# Altium PCB MGMEZZ04_LoopBack.PcbDoc
Units mil, origin at the board's own origin, x right, y up, seen from the top; angles counter-clockwise.
Board outline 915 x 2800 mil, 4 copper layers (Top Layer, Internal Plane 1, Internal Plane 2, Bottom Layer), stack 30.634 mil thick; 42 components, 48 nets, 146 pads, 49 vias.
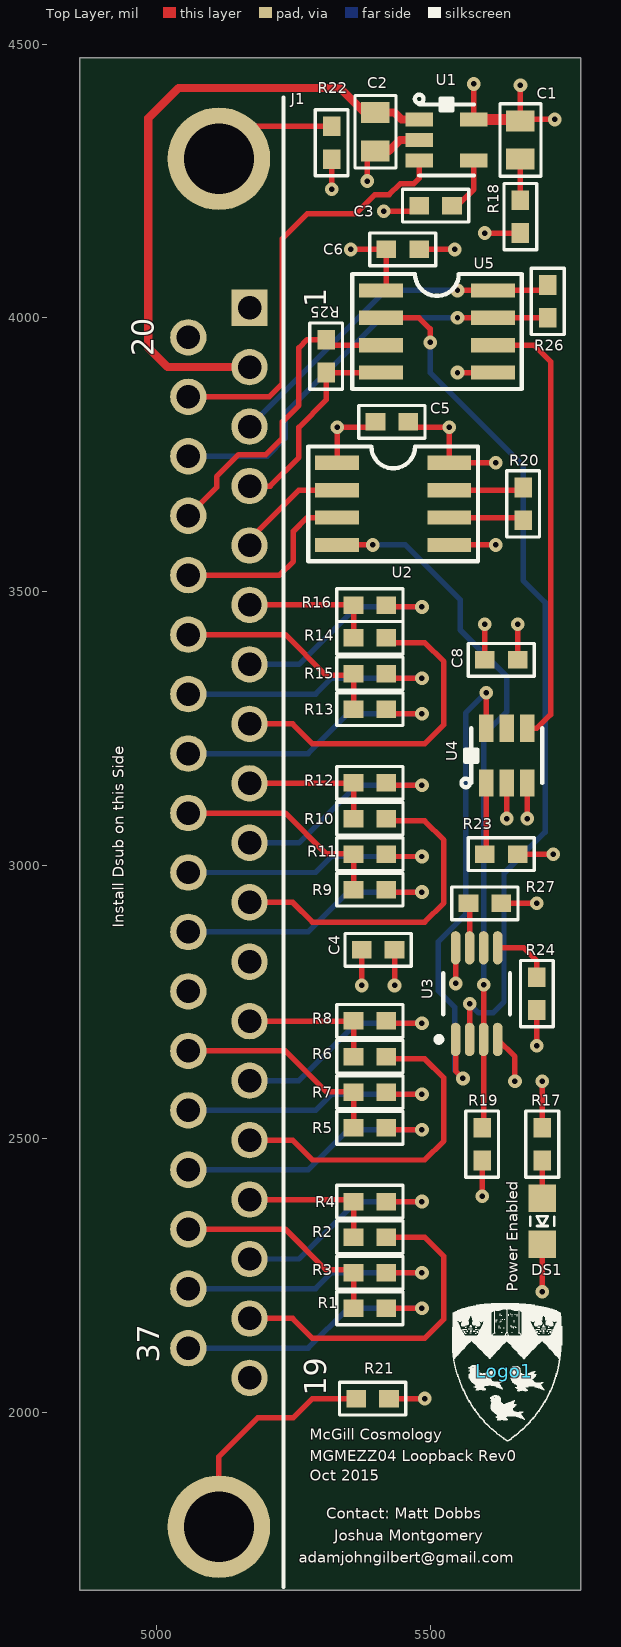
[diagram p0: Top Layer view]
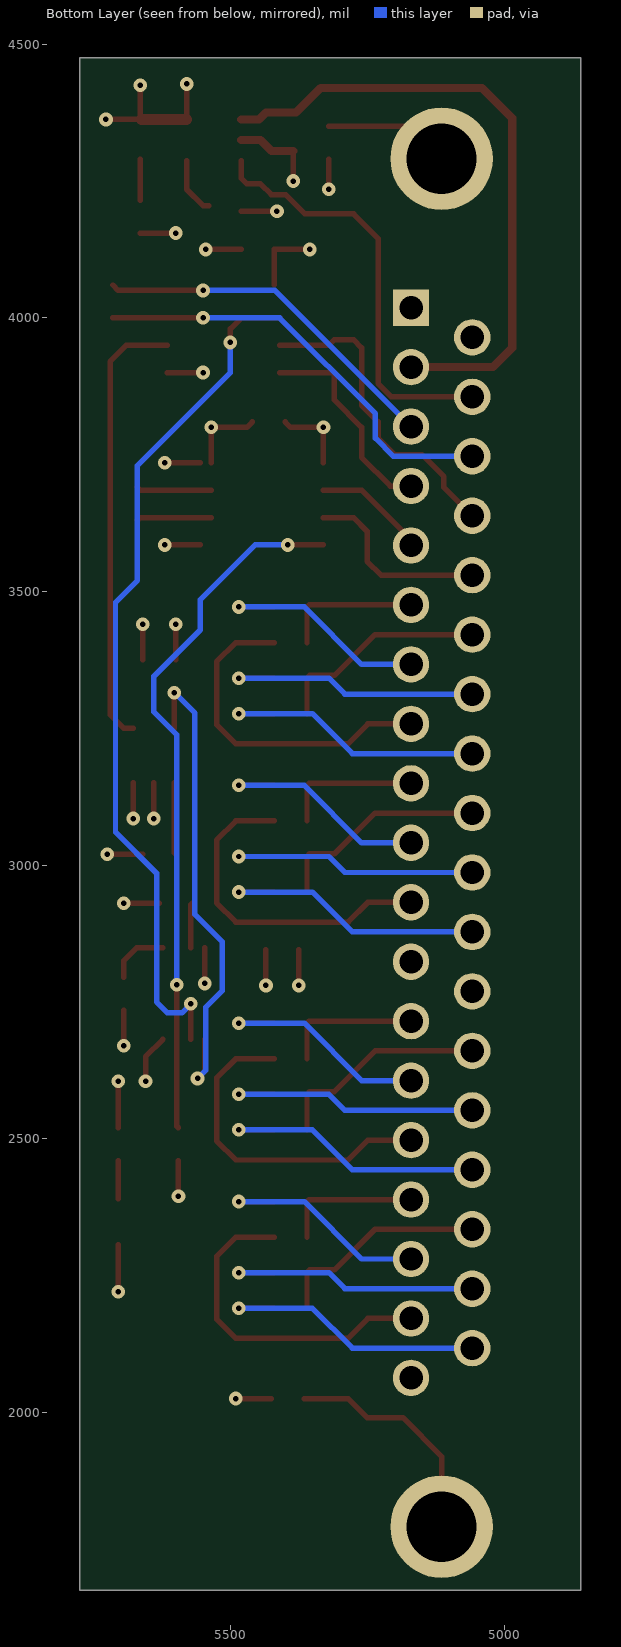
[diagram p1: Bottom Layer view, seen from below]
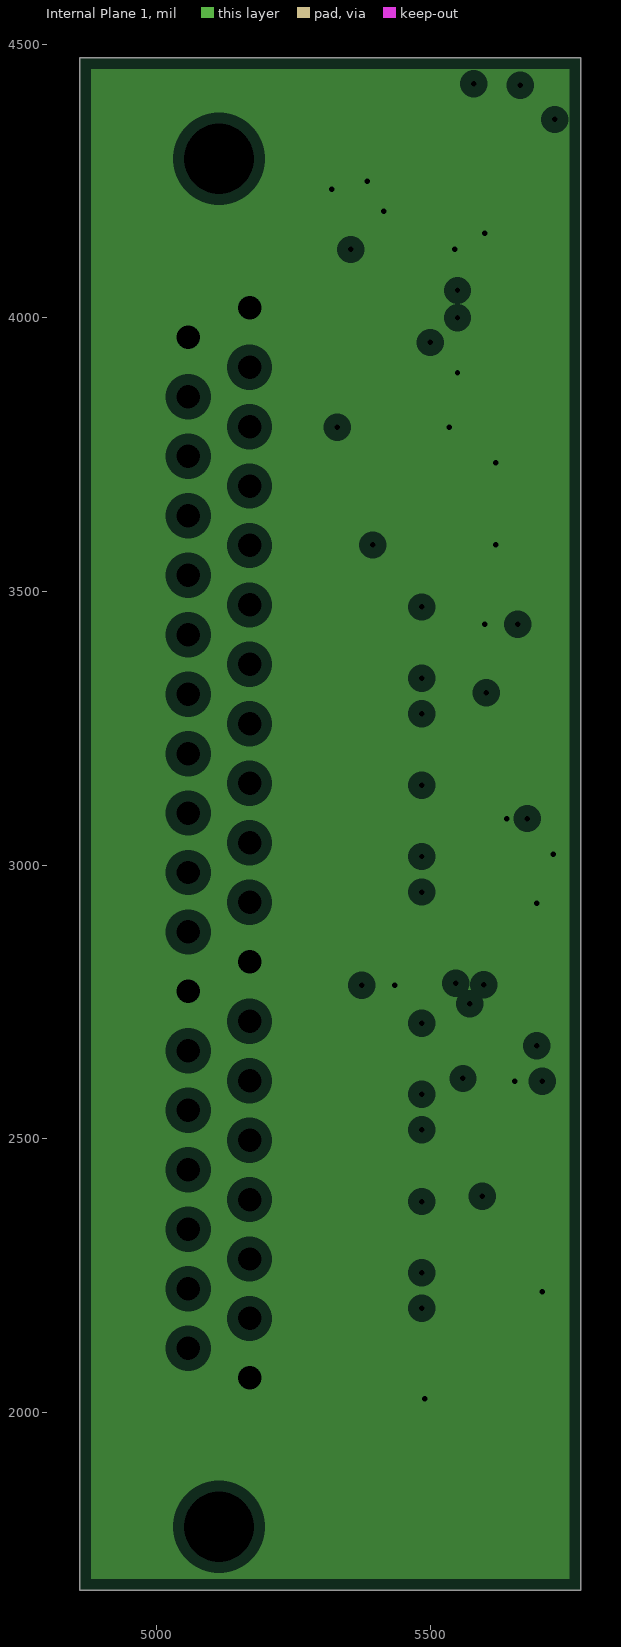
[diagram p2: Internal Plane 1, clearances drawn from the general rule]
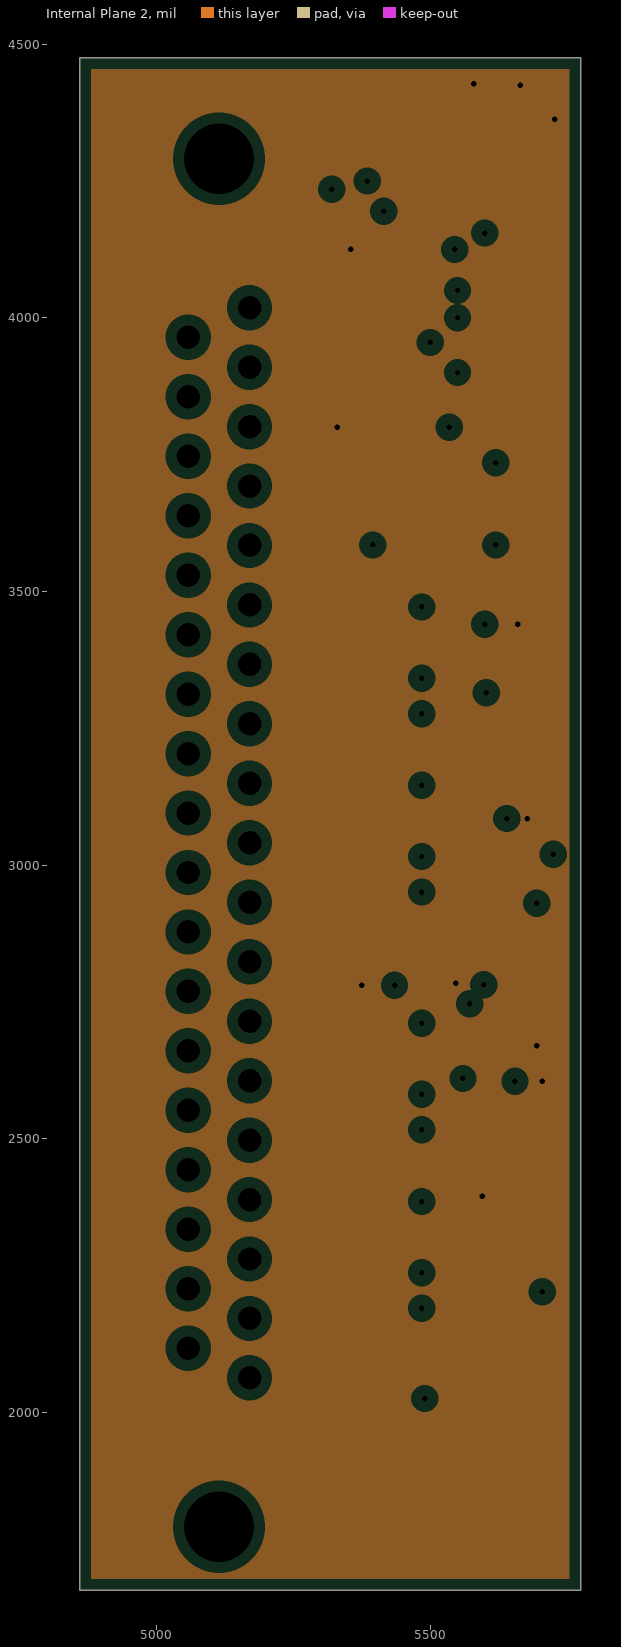
[diagram p3: Internal Plane 2, clearances drawn from the general rule]

## Layer stack, top to bottom
Top Solder: solder mask 0.4, Solder Resist, Dk 3.5
Top Layer: signal copper 1.4
Dielectric 1: core 10, FR-4, Dk 4.2
Internal Plane 1: plane copper 1.417, net GND
Dielectric 3: prepreg 5, Dk 4.2
Internal Plane 2: plane copper 1.417, net 5VD
Dielectric 2: core 10, Dk 4.2
Bottom Layer: signal copper 1.4
Bottom Solder: solder mask 0.4, Solder Resist, Dk 3.5

## Board outline
4860,1675 5775,1675 5775,4475 4860,4475

## Design rules (kind name [scope] priority, off if disabled: settings)
Clearance [All] p1: gap=7
DiffPairsRouting [All] p1: maxlimit=10 minlimit=10 mostfreqgap=10 toplayer_minwidth=10 toplayer_maxwidth=15 toplayer_prefwidth=15 bottomlayer_minwidth=10 bottomlayer_maxwidth=15 bottomlayer_prefwidth=15 maxuncoupledlength=500
HoleSize [All] p1: absolutevalues=TRUE maxlimit=500 minlimit=8 maxpercent=80.000 minpercent=20.000
MinimumSolderMaskSliver [All] p1: minsoldermaskwidth=3.5
PlaneClearance [All] p1: clearance=20
PlaneConnect [All] p1: planeconnectstyle=Relief reliefexpansion=20 reliefentries=4 reliefconductorwidth=10 reliefairgap=10
PolygonConnect [All] p1: connectstyle=Relief reliefconductorwidth=10 reliefentries=4 polygonreliefangle="90 Angle" airgapwidth=10
RoutingVias [All] p1: holewidth=28 width=50 viastyle="Through Hole" minholewidth=28 minwidth=50 maxholewidth=28 maxwidth=50
SilkToSilkClearance [All] p1: silktosilkclearance=0
SilkToSolderMaskClearance [IsPad] p1: minsilkscreentomaskgap=5 clearancetoexposedcopper=TRUE
SolderMaskExpansion [All] p1: expansion=3
Width [All] p1: maxlimit=100 minlimit=10 preferedwidth=10 minimp=50.000000 maximp=50.000000 favimp=50.000000
23 further rules are at their usual default settings.

## Classes and differential pairs
differential pair SDA_MOSI: +SDA_MOSI_P -SDA_MOSI_N
differential pair SDA_MISO: +SDA_MISO_P -SDA_MISO_N
differential pair SCL: +SCL_P -SCL_N

## Components (designator, comment, footprint, x,y, rotation, side; value= is the part's Value field where it differs from the comment)
C1 "4.7uF, 10V" 0805 5665,4290 r90 top
C2 "4.7uF, 10V" 0805 5400,4305 r90 top
C3 "470pF" 0603 5480,4205 r0 top
C4 "0.1uF" 0603 5435,2845 r180 top
C5 "0.1uF" 0603 5460,3810 r180 top
C6 "0.1uF" 0603 5480,4125 r180 top
C8 "0.1uF" 0603 5600,3375 r0 top
DS1 "LED, 0805, Green" 0805L 5705,2390.58 r270 top
J1 "DB37M" DSUB37-M 5114.02,4290.75 r90 top
Logo1 "McGillLogo" McGillLogo1 5635,2075 r0 top
R1 "4.99k" 0603 5360,2190 r0 top
R2 "4.99k" 0603 5360,2320 r0 top
R3 "4.99k" 0603 5360,2255 r0 top
R4 "4.99k" 0603 5360,2385 r0 top
R5 "4.99k" 0603 5360,2520 r0 top
R6 "4.99k" 0603 5360,2650 r0 top
R7 "4.99k" 0603 5360,2585 r0 top
R8 "4.99k" 0603 5360,2715 r0 top
R9 "4.99k" 0603 5360,2955 r0 top
R10 "4.99k" 0603 5360,3085 r0 top
R11 "4.99k" 0603 5360,3020 r0 top
R12 "4.99k" 0603 5360,3150 r0 top
R13 "4.99k" 0603 5360,3285 r0 top
R14 "4.99k" 0603 5360,3415 r0 top
R15 "4.99k" 0603 5360,3350 r0 top
R16 "4.99k" 0603 5360,3475 r0 top
R17 "100" 0603 5705,2520 r270 top
R18 "4.99k" 0603 5665,4155 r90 top
R19 "4.99k" 0603 5595,2520 r270 top
R20 "DNL" 0603 5670,3630 r90 top
R21 "0" 0603 5365,2025 r0 top
R22 "0" 0603 5320,4290 r90 top
R23 "DNL" 0603 5600,3020 r0 top
R24 "4.99k" 0603 5695,2795 r270 top
R25 "100" 0603 5310,3900 r90 top
R26 "100" 0603 5715,4060 r270 top
R27 "4.99k" 0603 5630,2930 r180 top
U1 "MIC5219-5.0YM5 TR" SOT23-5 5480,4325 r270 top
U2 "DS90C401M/NOPB" SO8 5330,3735 r0 top
U3 "P82B96DP,118" MSOP8-P82B96 5585,2765 r90 top
U4 "AD7414ARTZ-0500RL7" SOT23-6 5640,3150 r0 top
U5 "DS90C402M/NOPB" SO8 5410,4050 r0 top

## Footprints (in the part's own frame and the unit in brackets; to place one, negate y for a bottom-side part, rotate by r counter-clockwise, add the part's x,y. Pads: shape width x height; smd on the part's side, far side on the other; paste and mask are expansions set on the pad)
0603 [mil]
  rect 36x32 smd: 1(0,0) 2(60,0)
  silkscreen extent -30,-30 90,30, body extent -15,-15 75,15, height 39
0805 [mil]
  rect 38.5x52 smd: 1(0,0) 2(70,0)
  silkscreen extent -31,-38 101,38
0805L [mil] "0805 LED"
  rect 50x50 smd: 1(-0.4,0.18) 2(83.6,0.18)
  silkscreen extent 33,-22 50,22
DSUB37-M [mm] "DSUB 37Pin Male"
  rect 1.69x1.69 hole 1.09: 1(-6.912,-1.42)
  round 1.69 hole 1.09: 2(-9.672,-1.42) 3(-12.432,-1.42) 4(-15.192,-1.42) 5(-17.952,-1.42) 6(-20.712,-1.42) 7(-23.472,-1.42) 8(-26.232,-1.42) 9(-28.992,-1.42) 10(-31.752,-1.42) 11(-34.512,-1.42) 12(-37.272,-1.42) 13(-40.032,-1.42) 14(-42.792,-1.42) 15(-45.552,-1.42) 16(-48.312,-1.42) 17(-51.072,-1.42) 18(-53.832,-1.42) 19(-56.592,-1.42) 20(-8.291,1.42) 21(-11.051,1.42) 22(-13.811,1.42) 23(-16.571,1.42) 24(-19.331,1.42) 25(-22.091,1.42) 26(-24.851,1.42) 27(-27.611,1.42) 28(-30.371,1.42) 29(-33.131,1.42) 30(-35.891,1.42) 31(-38.651,1.42) 32(-41.411,1.42) 33(-44.171,1.42) 34(-46.931,1.42) 35(-49.691,1.42) 36(-52.451,1.42) 37(-55.211,1.42)
  round 4.76 hole 3.26: 38(0,0) 39(-63.5,0)
  silkscreen extent -66.29,-3 2.84,-3
McGillLogo1 [mil] "McGillLogo"
  silkscreen extent -95,-127 106,124
MSOP8-P82B96 [mm] "TSOP, 8-Leads, Body 3.1x3.1mm (max), Pitch 0.65mm, IPC Medium Density"
  oval 1.55x0.45 smd paste-0.051 mask+0.102: 1(-2.125,0.975) 2(-2.125,0.325) 3(-2.125,-0.325) 4(-2.125,-0.975) 5(2.125,-0.975) 6(2.125,-0.325) 7(2.125,0.325) 8(2.125,0.975)
  silkscreen extent -2.25,-1.55 0.95,1.87, body extent -1.55,-1.55 1.55,1.55, height 1.1
SO8 [mil]
  round 10 on Top Overlay: 0(-40,40)
  rect 80x26 smd: 1(0,0) 2(0,-50) 3(0,-100) 4(0,-150) 5(205,-150) 6(205,-100) 7(205,-50) 8(205,0)
  silkscreen extent -52,-180 258,30, body extent -40,-165 245,15, height 39
SOT23-5 [mil]
  rect 26x50 smd: 1(-37.5,0) 2(0,0) 3(37.5,0) 4(37.5,100) 5(-37.5,100)
  silkscreen extent -83,-8 65,100
SOT23-6 [mil]
  rect 26x50 smd: 1(-37.5,0) 2(0,0) 3(37.5,0) 4(37.5,100) 5(0,100) 6(-37.5,100)
  silkscreen extent -83,-8 65,100

## Part data
C1 C2: library part "CAP 0805", "Capacitor, Ceramic, 0805"
C3 C4 C5 C6 C8: library part Cap0603, "Capacitor, Ceramic, 0603"
DS1: library part LED, "LED GREEN CLEAR 0805 SMD"
Logo1: library part Logo
R1 R2 R3 R4 R5 R6 R7 R8 R9 R10 R11 R12 R13 R14 R15 R16 R18 R19 R20 R23 R24 R27: library part Res0603, "RES 0603"
R17 R21 R22 R25 R26: library part "RES 0603", "RES 0603"
U1: library part TPS73601DBVR, "Adjustable 30uVrms noise 400mA regulator"
U2: "IC DRV LVDS DUAL DIFF SGNL 8SOIC"
U3: library part P82B96, "IC DUAL BI-DIR BUS BUFFER 8-TSSOP"
U4: "Digital Temperature Sensor, 11-Bit, +/-2 Degree Accurate"
U5: "IC REC LVDS DUAL DIFF SGNL 8SOIC"

## Via types
v1: diameter 25, hole 10, Top Layer to Bottom Layer, 49 vias

## Nets (pads, with @x,y where several pads share a name; then routed paths per layer and width w, separated by ;. In a path a pad name is that pad's centre, name@x,y a point inside that pad or via, vN(x,y) a via of type N, cw(c..) or ccw(c..) an arc to the next point about the centre after c; other vN are vias at no path point)
5VD: C1.2 C4.2 C5.2 C6.2 C8.2 R17.1 R19.2 R24.2 U1.5 U2.1 U3.8 U4.3 U5.1 | length 1025.2
  Top Layer w10: U2.1 v1(5330,3800) 5390,3800 C5.2 ; v1(5355,4125) C6.2 U5.1@5420,4060 ; v1(5375,2780) C4.2 ; v1(5546.61,2783.66) U3.8 ; U1.5 v1(5580,4427.5) ; v1(5595,2395) R19.2 ; C8.2 v1(5660,3440) ; v1(5665,4425) C1.2 5662.5,4362.5 v1(5727.5,4362.5) ; v1(5677.5,3085) U4.3 ; v1(5695,2670) R24.2 ; R17.1 v1(5705,2605)
  Top Layer w20: U1.5 C1.2@5662.5,4362.5
CARRIER1_N: J1.18 R2.2 | length 619.1
  Top Layer w10: J1.18 5248.62,2171.38 5285,2135 5490,2135 5525,2170 5525,2285 5490,2320 R2.2
CARRIER1_P: J1.37 R1.2 | length 522.1
  Top Layer w10: R1.2 v1(5485,2190)
  Bottom Layer w10: J1.37 5277.09,2117.09 5350,2190 v1(5485,2190)
CARRIER2_N: J1.15 R6.2 | length 619.1
  Top Layer w10: J1.15 5248.62,2497.36 5285,2460.98 5490,2460.98 5525,2495.98 5525,2610.98 5490,2645.98 R6.2@5420,2645.98
CARRIER2_P: J1.34 R5.2 | length 522.1
  Top Layer w10: R5.2@5420,2515.98 v1(5485,2515.98)
  Bottom Layer w10: J1.34 5277.09,2443.07 5350,2515.98 v1(5485,2515.98)
CARRIER3_N: J1.11 R10.2 | length 619.1
  Top Layer w10: J1.11 5248.62,2932.01 5285,2895.63 5490,2895.63 5525,2930.63 5525,3045.63 5490,3080.63 R10.2@5420,3080.63
CARRIER3_P: J1.30 R9.2 | length 522.1
  Top Layer w10: R9.2@5420,2950.63 v1(5485,2950.63)
  Bottom Layer w10: J1.30 5277.09,2877.72 5350,2950.63 v1(5485,2950.63)
CARRIER4_N: J1.8 R14.2 | length 619.1
  Top Layer w10: J1.8 5248.62,3257.99 5285,3221.61 5490,3221.61 5525,3256.61 5525,3371.61 5490,3406.61 R14.2@5420,3406.61
CARRIER4_P: J1.27 R13.2 | length 522.1
  Top Layer w10: R13.2@5420,3276.61 v1(5485,3276.61)
  Bottom Layer w10: J1.27 5277.09,3203.7 5350,3276.61 v1(5485,3276.61)
DEMOD1_N: J1.16 R2.1 R4.1 | length 256.6
  Top Layer w10: J1.16 5356.3,2388.7 R4.1 R2.1
DEMOD1_P: J1.35 R1.1 R3.1 | length 399.8
  Top Layer w10: J1.35 5235.59,2334.41 5310,2260 5355,2260 R3.1 R1.1
DEMOD2_N: J1.13 R6.1 R8.1 | length 256.6
  Top Layer w10: J1.13 5356.3,2714.69 5360,2710.98 R6.1@5360,2645.98
DEMOD2_P: J1.32 R5.1 R7.1 | length 399.8
  Top Layer w10: J1.32 5235.59,2660.39 5310,2585.98 5355,2585.98 5360,2580.98 R5.1@5360,2515.98
DEMOD3_N: J1.9 R10.1 R12.1 | length 256.6
  Top Layer w10: J1.9 5356.3,3149.33 5360,3145.63 R10.1@5360,3080.63
DEMOD3_P: J1.28 R9.1 R11.1 | length 399.8
  Top Layer w10: J1.28 5235.59,3095.04 5310,3020.63 5355,3020.63 5360,3015.63 R9.1@5360,2950.63
DEMOD4_N: J1.6 R14.1 R16.1 | length 256.6
  Top Layer w10: J1.6 5356.3,3475.32 5360,3471.61 R14.1@5360,3406.61
DEMOD4_P: J1.25 R13.1 R15.1 | length 399.8
  Top Layer w10: J1.25 5235.59,3421.02 5310,3346.61 5355,3346.61 5360,3341.61 R13.1@5360,3276.61
GND: C2.1 C3.1 C4.1 C5.1 C6.1 C8.1 DS1.2 J1.1 J1.12 J1.19 J1.20 J1.31 R18.1 R21.2 R22.1 R23.2 R27.1 U1.2 U2.5 U2.8 U3.4 U4.2 U5.5 | length 1313.3
  Top Layer w10: v1(5320,4235) R22.1 ; v1(5385,4250) C2.1@5385,4305 ; v1(5415,4195) C3.1@5480,4195 ; R21.2 v1(5490,2025) ; v1(5435,2780) C4.1 ; C5.1 5470,3800 v1(5535,3800) U2.8 ; C6.1 v1(5545,4125) ; v1(5550,3900) U5.5 ; U2.5@5555,3585 v1(5620,3585) ; U2.8@5555,3735 v1(5620,3735) ; C8.1 v1(5600,3440) ; v1(5600,4155) R18.1 ; U3.4 5655,2649.72 v1(5655,2605) ; R27.1 v1(5695,2930) ; v1(5640,3085) U4.2 ; R23.2 v1(5725,3020) ; v1(5705,2220) 5705,2306.22 DS1.2@5705.18,2306.4
  Top Layer w15: C2.1@5385,4305 5425,4305 5445,4325 U1.2
NetC1_1: C1.1 R18.2 | length 75
  Top Layer w10: R18.2 C1.1
NetC3_2: C3.2 U1.4 | length 104.9
  Top Layer w10: C3.2 5550,4205 5580,4235 U1.4
NetDS1_1: DS1.1 R17.2 | length 69.7
  Top Layer w10: R17.2 5705,2390.58 DS1.1@5705.18,2390.4
NetJ1_38: J1.38 R22.2 | length 230.5
  Top Layer w10: J1.38 5173.27,4350 R22.2
NetJ1_39: J1.39 R21.1 | length 423.2
  Top Layer w10: J1.39 5114.02,1919.02 5185,1990 5250,1990 5285,2025 R21.1
NetR19_1: R19.1 U2.4 U3.3 | length 1285.3
  Top Layer w10: U2.4 v1(5395,3585) ; R19.1 5597.8,2522.8 U3.3 v1(5597.8,2781.34)
  Bottom Layer w10: v1(5395,3585) 5455,3585 5555,3485 5555,3430 5640,3345 5640,3280 5597.8,3237.8 v1(5597.8,2781.34)
NetR20_1: R20.1 U2.6 | length 137.1
  Top Layer w10: U2.6 5665,3635 R20.1
NetR20_2: R20.2 U2.7 | length 137.1
  Top Layer w10: U2.7 5665,3685 R20.2
NetR23_1: R23.1 U4.1 | length 131
  Top Layer w10: R23.1 5602.5,3022.5 U4.1
NetR24_1: R24.1 U3.5 | length 111.4
  Top Layer w10: U3.5 5671.34,2848.66 5695,2825 R24.1
NetR27_2: R27.2 U3.7 | length 82.3
  Top Layer w10: R27.2 5572.2,2927.8 U3.7
NetU3_2: U3.2 U5.2 | length 1589.2
  Top Layer w10: U5.2 5480,4000 5500,3980 v1(5500,3955) ; U3.2 v1(5572.2,2746.34)
  Bottom Layer w10: v1(5500,3955) 5500,3900 5670,3730 5670,3520 5710,3480 5710,3060 5635,2985 5635,2750 5615,2730 5588.54,2730 v1(5572.2,2746.34)
NULLER1_N: J1.17 R4.2 | length 423.6
  Top Layer w10: R4.2 v1(5485,2385)
  Bottom Layer w10: J1.17 5260.04,2280.04 5365,2385 v1(5485,2385)
NULLER1_P: J1.36 R3.2 | length 504
  Top Layer w10: R3.2 v1(5485,2255)
  Bottom Layer w10: J1.36 5290.75,2225.75 5320,2255 v1(5485,2255)
NULLER2_N: J1.14 R8.2 | length 423.6
  Top Layer w10: R8.2@5420,2710.98 v1(5485,2710.98)
  Bottom Layer w10: J1.14 5260.04,2606.02 5365,2710.98 v1(5485,2710.98)
NULLER2_P: J1.33 R7.2 | length 504
  Top Layer w10: R7.2@5420,2580.98 v1(5485,2580.98)
  Bottom Layer w10: J1.33 5290.75,2551.73 5320,2580.98 v1(5485,2580.98)
NULLER3_N: J1.10 R12.2 | length 423.6
  Top Layer w10: R12.2@5420,3145.63 v1(5485,3145.63)
  Bottom Layer w10: J1.10 5260.04,3040.67 5365,3145.63 v1(5485,3145.63)
NULLER3_P: J1.29 R11.2 | length 504
  Top Layer w10: R11.2@5420,3015.63 v1(5485,3015.63)
  Bottom Layer w10: J1.29 5290.75,2986.38 5320,3015.63 v1(5485,3015.63)
NULLER4_N: J1.7 R16.2 | length 423.6
  Top Layer w10: R16.2@5420,3471.61 v1(5485,3471.61)
  Bottom Layer w10: J1.7 5260.04,3366.65 5365,3471.61 v1(5485,3471.61)
NULLER4_P: J1.26 R15.2 | length 504
  Top Layer w10: R15.2@5420,3341.61 v1(5485,3341.61)
  Bottom Layer w10: J1.26 5290.75,3312.36 5320,3341.61 v1(5485,3341.61)
P5V5FILT: C2.2 J1.2 U1.1 | length 1161
  Top Layer w15: J1.2 J1.2 5020,3910 4985,3945 4985,4365 5040,4420 5335,4420 5380,4375 C2.2 5435,4375 5447.5,4362.5 U1.1
POWEREN: J1.21 U1.3 | length 775
  Top Layer w10: J1.21 5205.67,3855.67 5230,3880 5230,4145 5275,4190 5363.89,4190 5398.89,4225 5425,4225 5445,4245 5470,4245 5480,4255 U1.3
SCL: U4.4 U5.6 | length 815.3
  Top Layer w10: U5.6 5690,3950 5720,3920 5720,3275 5695,3250 U4.4
SCL_N: J1.3 R26.1 U5.8 | length 652.2
  Top Layer w10: v1(5550,4050) U5.8 5705,4050 R26.1
  Bottom Layer w10: J1.3 5418.62,4050 v1(5550,4050)
SCL_P: J1.22 R26.2 U5.7 | length 788
  Top Layer w10: v1(5550,4000) U5.7 R26.2
  Bottom Layer w10: J1.22 5202.01,3747.01 5235,3780 5235,3825 5410,4000 v1(5550,4000)
SDA: U3.1 U4.6 | length 901.8
  Top Layer w10: U3.1 5546.61,2623.39 v1(5560,2610) ; U4.6 v1(5602.5,3315)
  Bottom Layer w10: v1(5560,2610) 5544.7,2625.3 5544.7,2740.3 5515,2770 5515,2860 5565,2910 5565,3277.5 v1(5602.5,3315)
SDA_MISO_N: J1.5 U2.2 | length 208.3
  Top Layer w10: J1.5 5169.92,3594.92 5260,3685 U2.2
SDA_MISO_P: J1.24 U2.3 | length 347.7
  Top Layer w10: J1.24 5224.69,3529.69 5250,3555 5250,3610 5275,3635 U2.3
SDA_MOSI_N: J1.4 R25.1 U5.4 | length 387.5
  Top Layer w10: J1.4 5207.64,3692.64 5260,3745 5260,3800 5310,3850 R25.1 U5.4
SDA_MOSI_P: J1.23 R25.2 U5.3 | length 579.9
  Top Layer w10: J1.23 5110,3690.24 5110,3710 5150,3750 5200,3750 5230,3780 5230,3810 5260,3840 5260,3945 5275,3960 R25.2 5320,3950 U5.3
pads on no net: U2.0 U3.6 U4.5 U5.0

## Polygon pours and split planes (outlines as drawn)
GND on Internal Plane 1 (split plane): 5754.9,1695.1 4880.1,1695.1 4880.1,4454.9 5754.9,4454.9
5VD on Internal Plane 2 (split plane): 5754.9,1695.1 4880.1,1695.1 4880.1,4454.9 5754.9,4454.9

## Silkscreen, mask and mechanical layers (free items; w line width, h text height)
Top Overlay:
  text "Install Dsub on this Side" at 4940,2885 h20 r90
  text "Power Enabled" at 5660,2220 h20 r90
  text "McGill Cosmology" at 5280,1950 h20
  text "MGMEZZ04 Loopback Rev0" at 5280,1910 h20
  text "Oct 2015" at 5280,1875 h20
  text "Contact: Matt Dobbs" at 5310,1805 h20
  text "Joshua Montgomery" at 5325,1765 h20
  text "adamjohngilbert@gmail.com" at 5260,1725 h20
Mechanical 1:
  the board outline again, w5

## Text inside footprints (layer, text, board x,y; h text height)
J1: Top Overlay "37" at 5005,2090 h40 r90; Top Overlay "1" at 5309.88,4019.41 h40 r90; Top Overlay "19" at 5310,2030 h40 r90; Top Overlay "20" at 4995,3930 h40 r90